# Altium PCB ScreenBase.PcbDoc
Units mil, origin at the board's own origin, x right, y up, seen from the top; angles counter-clockwise.
Board outline 1600 x 2030 mil, 2 copper layers (Top Layer, Bottom Layer); 12 components, 15 nets, 87 pads, 27 vias.
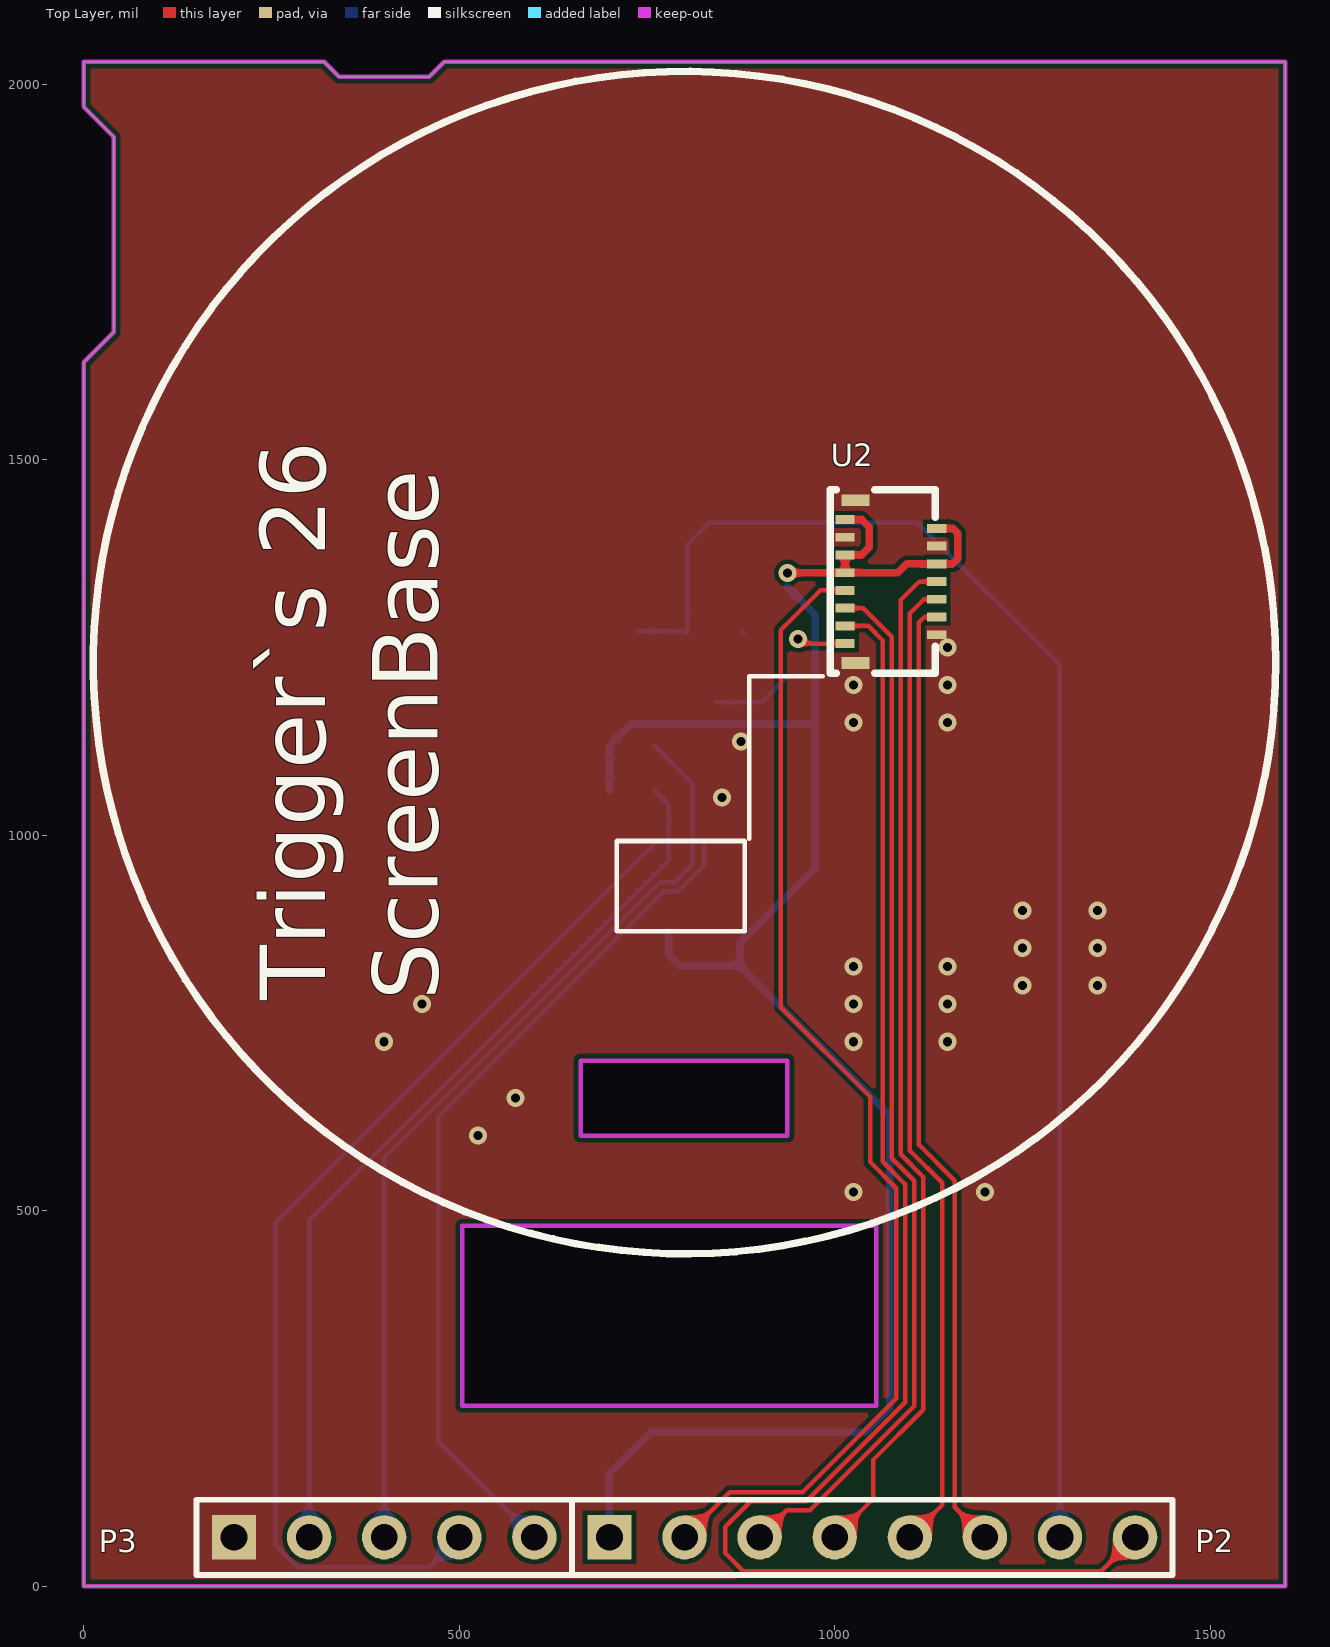
[diagram p0: Top Layer view]
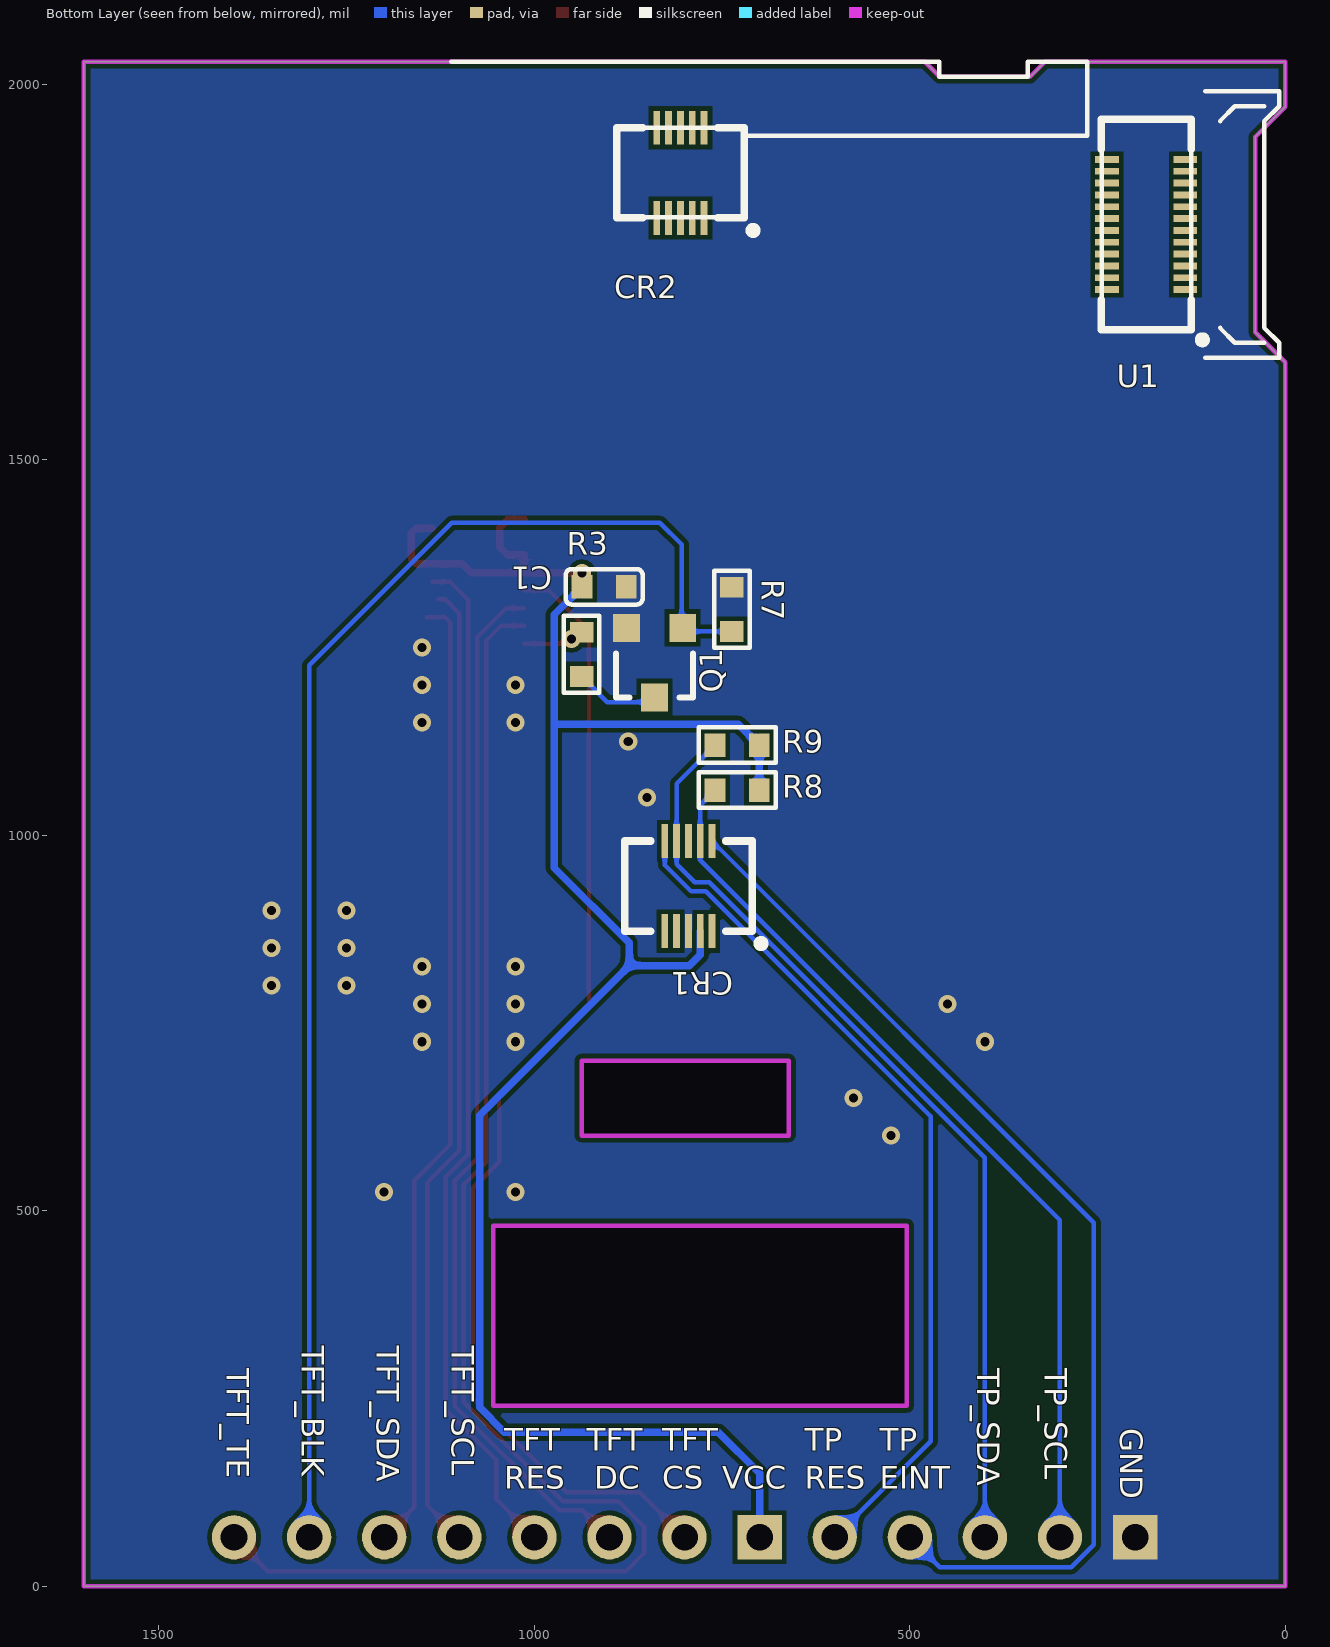
[diagram p1: Bottom Layer view, seen from below]
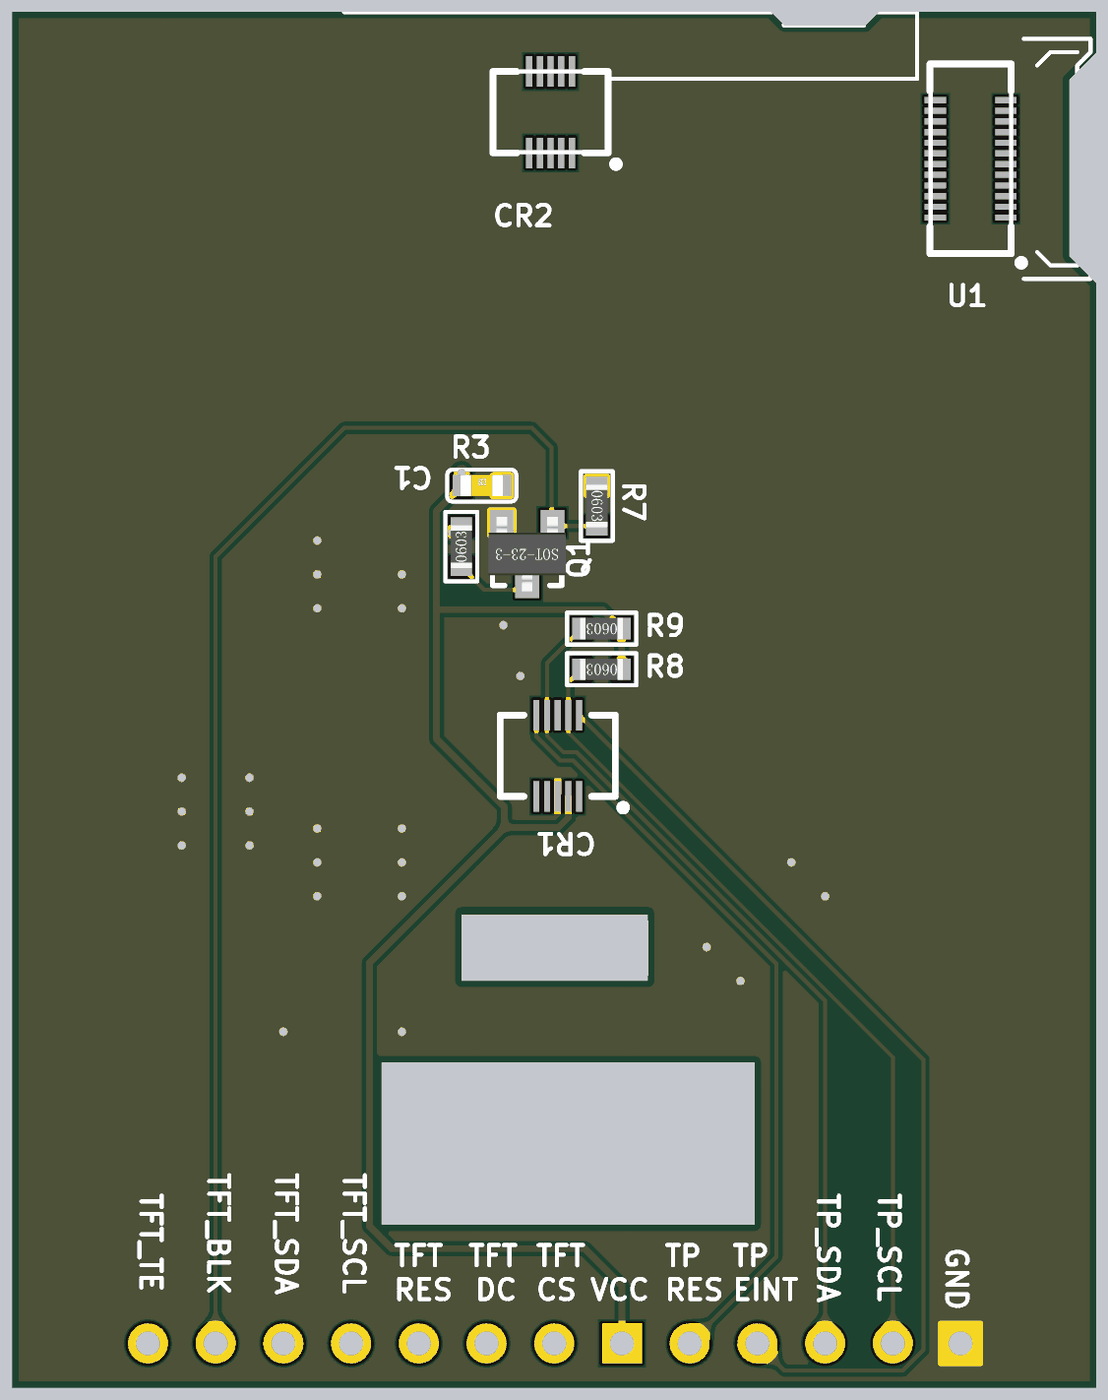
[diagram p2: 3D render of the assembled board from below, using the file's embedded part models]

## Layer stack, top to bottom
Top Solder: solder mask 0.4, Solder Resist, Dk 3.5
Top Layer: signal copper 1.4
Dielectric 1: dielectric 12.6, FR-4, Dk 4.8
Bottom Layer: signal copper 1.4
Bottom Solder: solder mask 0.4, Solder Resist, Dk 3.5

## Board outline
0,0 0,1630 40,1670 40,1930 0,1970 0,2030 320,2030 340,2010 460,2010 480,2030 1600,2030 1600,0
cut-out: 661.42,600 937.01,600 937.01,698 661.42,698
cut-out: 503.94,240 1055.12,240 1055.12,480 503.94,480

## Design rules (kind name [scope] priority, off if disabled: settings)
Clearance [All] p1: gap=6
ComponentClearance [All] p1 off: gap=10 collisioncheckmode=3 verticalgap=10 showdistances=FALSE
Height [All] p1 off: minheight=0 maxheight=1000 prefheight=500
HoleSize [All] p1 off: absolutevalues=TRUE maxlimit=100 minlimit=1 maxpercent=80.000 minpercent=20.000
HoleToHoleClearance [All] p1 off: gap=10 allowstackedmicrovias=TRUE
LayerPairs [All] p1 off: enforce=TRUE
MinimumSolderMaskSliver [All] p1 off: minsoldermaskwidth=10
NetAntennae [All] p1 off: netantennaetolerance=0
PlaneConnect [All] p1: planeconnectstyle=Direct reliefexpansion=20 reliefentries=4 reliefconductorwidth=10 reliefairgap=10
PolygonConnect [All] p1: connectstyle=Direct reliefconductorwidth=10 reliefentries=4 polygonreliefangle="90 Angle" airgapwidth=10
RoutingVias [All] p1: holewidth=12 width=24 viastyle="Through Hole" minholewidth=12 minwidth=24 maxholewidth=12 maxwidth=24
SilkToSilkClearance [All] p1 off: silktosilkclearance=10
SilkToSolderMaskClearance [IsPad] p1 off: minsilkscreentomaskgap=10 clearancetoexposedcopper=TRUE
SolderMaskExpansion [All] p1: expansion=4
Width [All] p1: maxlimit=133 minlimit=6 preferedwidth=6
20 further rules are at their usual default settings.

## Components (designator, comment, footprint, x,y, rotation, side; value= is the part's Value field where it differs from the comment)
C1 "105" 电容_C0603 907.08,1330.94 r180 bottom
CR1 "CR10P" "CONN RCPT 10POS 0.4MM" 784.88,942.36 r180 bottom
CR2 "CR10P" "CONN RCPT 10POS 0.4MM" 795.47,1892.17 r180 bottom
P2 "Header 8" HDR1X8 700,65 r0 top
P3 "Header 5" HDR1X5 200,65 r0 top
Q1 "AO3400" MOS_SOT-23 840,1230 r0 bottom
R3 "10R" 电阻_R0603 937.08,1240.94 r90 bottom
R7 "10K" 电阻_R0603 737.08,1300.94 r270 bottom
R8 "10K" 电阻_R0603 730,1060 r0 bottom
R9 "10K" 电阻_R0603 730,1120 r0 bottom
U1 "TFT" CONN-SMD_DF37NC-24DS-0.4V(51) 185.24,1813.43 r90 bottom
U2 "TFT" FPC-0.30mm-15P 1074.8,1337.87 r270 top

## Footprints (in the part's own frame and the unit in brackets; to place one, negate y for a bottom-side part, rotate by r counter-clockwise, add the part's x,y. Pads: shape width x height; smd on the part's side, far side on the other; paste and mask are expansions set on the pad)
"CONN RCPT 10POS 0.4MM" [mil] "板对板连接器"
  rect 9.05x45 smd: 1(21.49,-70.03) 2(5.74,-70.03) 3(-10,-70.03) 4(-25.75,-70.03) 5(-41.5,-70.03) 6(-41.5,50.04) 7(-25.75,50.04) 8(-10,50.04) 9(5.74,50.04) 10(21.49,50.04)
  silkscreen extent -95,-92 92,50
CONN-SMD_DF37NC-24DS-0.4V(51) [mm] "板对板连接器"
  rect 0.23x0.8 smd: 1(-2.2,-1.325) 2(-1.8,-1.325) 3(-1.4,-1.325) 4(-1,-1.325) 5(-0.6,-1.325) 6(-0.2,-1.325) 7(0.2,-1.325) 8(0.6,-1.325) 9(1,-1.325) 10(1.4,-1.325) 11(1.8,-1.325) 12(2.2,-1.325) 13(2.2,1.325) 14(1.8,1.325) 15(1.4,1.325) 16(1,1.325) 17(0.6,1.325) 18(0.2,1.325) 19(-0.2,1.325) 20(-0.6,1.325) 21(-1,1.325) 22(-1.4,1.325) 23(-1.8,1.325) 24(-2.2,1.325)
  silkscreen extent -4.03,-2.03 3.56,1.52
FPC-0.30mm-15P [mm] "FPC翻盖式 下接"
  rect 0.3x0.65 smd: 1(2.1,-1.55) 2(1.8,1.55) 3(1.5,-1.55) 4(1.2,1.55) 5(0.9,-1.55) 6(0.6,1.55) 7(0.3,-1.55) 8(0,1.55) 9(-0.3,-1.55) 10(-0.6,1.55) 11(-0.9,-1.55) 12(-1.2,1.55) 13(-1.5,-1.55) 14(-1.8,1.55) 15(-2.1,-1.55)
  rect 0.4x0.95 smd: 16(-2.75,-1.2) 17(2.75,-1.2)
  silkscreen extent -3.1,-2.05 3.1,1.5
HDR1X5 [mm] "Connector; Header; 5 Position"
  rect 1.5x1.5 hole 0.9: 1(0,0)
  round 1.5 hole 0.9: 2(2.54,0) 3(5.08,0) 4(7.62,0) 5(10.16,0)
  silkscreen extent -1.27,-1.27 11.43,1.27
HDR1X8 [mm] "Connector; Header; 8 Position"
  rect 1.5x1.5 hole 0.9: 1(0,0)
  round 1.5 hole 0.9: 2(2.54,0) 3(5.08,0) 4(7.62,0) 5(10.16,0) 6(12.7,0) 7(15.24,0) 8(17.78,0)
  silkscreen extent -1.27,-1.27 19.05,1.27
MOS_SOT-23 [mm]
  rect 0.9x0.95 smd: 1(-0.95,-1.175) 2(0,1.175) 3(0.95,-1.175)
  silkscreen extent -1.3,-0.3 1.3,1.18, body extent -1.45,-1.4 1.45,1.4, height 1.2
电容_C0603 [mm]
  rect 0.7x0.8 smd: 1(-0.75,0) 2(0.75,0)
  silkscreen extent -1.3,-0.6 1.3,0.6, body extent -0.8,-0.4 0.8,0.4, height 0.3
电阻_R0603 [mm]
  rect 0.7x0.8 smd: 1(-0.75,0) 2(0.75,0)
  silkscreen extent -1.3,-0.6 1.3,0.6, body extent -0.8,-0.4 0.8,0.4, height 0.45

## Part data
C1: library part cap
CR1 CR2: library part "CONN RCPT 10P", "板对板连接器"
P2: "Header, 8-Pin"
P3: "Header, 5-Pin"
Q1: library part MOSFET-N
R3 R7 R8 R9: library part Res
U1: library part TFT_IPS_8Bit_1.54_240*240
U2: library part TFT_IPS1-1.54寸240*240-AML015410V1, "IPS电容式触摸屏"

## Via types
v1: diameter 24, hole 12, Top Layer to Bottom Layer, tented both sides, 27 vias

## Nets (pads, with @x,y where several pads share a name; then routed paths per layer and width w, separated by ;. In a path a pad name is that pad's centre, name@x,y a point inside that pad or via, vN(x,y) a via of type N, cw(c..) or ccw(c..) an arc to the next point about the centre after c; other vN are vias at no path point)
GND: C1.2 CR1.3 P3.1 Q1.3 R7.1 U2.2 U2.12 U2.13 U2.16 U2.17 | length 1.6
  Bottom Layer w6: Q1.3@877.56,1270.98 Q1.3@878.66,1269.88
  other v1: 1025,525 1200,525 525,600 575,650 400,725 1025,725 1150,725 450,775 1025,775 1150,775 1250,800 1350,800 1025,825 1150,825 1250,850 1350,850 1250,900 1350,900 850,1050 875,1125 1025,1150 1150,1150 1025,1200 1150,1200 1150,1250
NetQ1_2: Q1.2 R3.1 | length 109.9
  Bottom Layer w6: Q1.2@841.26,1177.36 903.03,1177.36 R3.1
SCREEN_VCC: C1.1 CR1.2 P2.1 R8.1 R9.1 U2.9 U2.10 U2.11 U2.14 U2.15 | length 2626.9
  Top Layer w10: v1(936.88,1349.36) 1013.45,1349.36 U2.9 ; U2.15 1035.69,1420.55 1045.88,1410.36 1045.88,1383.36 1035.82,1373.3 U2.11 U2.9 ; U2.14 1157.5,1408.74 1163.88,1402.36 1163.88,1368.36 1157.01,1361.49 U2.10 1096.01,1361.49 1084.2,1349.68 U2.9
  Bottom Layer w10: P2.1 700,150 755,205 1039.92,205 1073,238.08 1073,627 873.64,826.36 ; R8.1 R9.1 728.47,1148 972.88,1148 973.88,1149 ; CR1.2 779.14,841.1 793.88,826.36 873.64,826.36 ; C1.1 973.88,1293.68 973.88,1149 ; 873.64,826.36 873.64,856.64 973.88,956.88 973.88,1149
TFT_BLK: P2.7 Q1.1 R7.2 | length 1933
  Bottom Layer w6: R7.2 802.32,1271.42 803.86,1269.88 803.86,1328.19 803.86,1387.24 832.97,1416.36 1109.88,1416.36 1300,1226.24 P2.7
TFT_CS: P2.2 U2.7 | length 1553.6
  Top Layer w6: P2.2 860,125 957.09,125 1082,249.91 1082,530 1047,565 1047,652 927.88,771.12 927.88,1273.36 980.58,1326.06 U2.7
TFT_DC: P2.3 U2.5 | length 1393.2
  Top Layer w6: P2.3 936,101 967.03,101 1106,239.97 1106,539.94 1075.88,570.06 1075.88,1264.36 1037.8,1302.44 U2.5
TFT_LEDK: R3.2 U2.1 | length 65.5
  Top Layer w6: v1(950.88,1261.36) 957.05,1255.19 U2.1
TFT_RES: P2.4 U2.8 | length 1367.8
  Top Layer w6: P2.4 1051,116 1051,168 1118,235 1118,544.91 1087.88,575.03 1087.88,1313.36 1112.39,1337.87 U2.8
TFT_SCL: P2.5 U2.6 | length 1302
  Top Layer w6: P2.5 1143,108 1143,537 1099.88,580.12 1099.88,1295.36 1118.77,1314.25 U2.6@1128,1314.25
TFT_SDA: P2.6 U2.4 | length 1289.6
  Top Layer w6: U2.4@1143.62,1290.63 U2.4 1119.15,1290.63 1111.88,1283.36 1111.88,588.12 1160,540 1160,105 P2.6
TFT_TE: P2.8 U2.3 | length 2003.4
  Top Layer w6: U2.3 1044.45,1278.82 1063.88,1259.39 1063.88,565.09 1094,534.97 1094,244.94 962.06,113 888,113 854,79 854,44 878,20 1355,20 P2.8
TP_EINT: CR1.10 P3.4 | length 1437
  Bottom Layer w6: P3.4@500,80 P3.4 460,25 285,25 255,55 255,484.02 CR1.10
TP_RES: CR1.6 P3.5 | length 1138.6
  Bottom Layer w6: P3.5 472,193 472,625.48 771.88,925.36 791.36,925.36 826.38,960.38 CR1.6
TP_SCL: CR1.9 P3.2 R8.2 | length 1201.6
  Bottom Layer w6: P3.2 300,487.48 405.05,592.53 779.14,966.62 CR1.9 779.14,1040.39 R8.2
TP_SDA: CR1.7 P3.3 R9.2 | length 1257.7
  Bottom Layer w6: P3.3 400,570.45 766.91,937.36 786.39,937.36 810.63,961.6 CR1.7 810.63,1068.9 R9.2
pads on no net: CR1.1 CR1.4 CR1.5 CR1.8 CR2.1 CR2.2 CR2.3 CR2.4 CR2.5 CR2.6 CR2.7 CR2.8 CR2.9 CR2.10 U1.1 U1.2 U1.3 U1.4 U1.5 U1.6 U1.7 U1.8 U1.9 U1.10 U1.11 U1.12 U1.13 U1.14 U1.15 U1.16 U1.17 U1.18 U1.19 U1.20 U1.21 U1.22 U1.23 U1.24

## Polygon pours and split planes (outlines as drawn)
GND on Top Layer "GND" (solid, remove dead copper, pour order 6): 0,2030 1600,2030 1600,0 0,0
GND on Bottom Layer "GND" (solid, remove dead copper, pour order 4): 0,2025 1600,2025 1600,0 0,0

## Keep-outs
Keep-Out Layer:
  lines w6: 0,0 0,1630 40,1670 40,1930 0,1970 0,2030 320,2030 340,2010 460,2010 480,2030 1600,2030 1600,0 0,0 ; 503.94,240 503.94,480 1055.12,480 1055.12,240 503.94,240 ; 661.42,600 661.42,700 937.01,700 937.01,600 661.42,600

## Silkscreen, mask and mechanical layers (free items; w line width, h text height)
Top Overlay:
  circle w10: c800,1230 r787.4
  lines w6: 885.82,995.35 885.82,1211.89 984.25,1211.89 ; 709.88,872.36 879.88,872.36 879.88,992.36 709.88,992.36 709.88,872.36
  text "Trigger`s 26" at 350,780 h150 r90
  text "ScreenBase" at 500,780 h150 r90
Bottom Overlay:
  lines w6: 27.76,1655.95 67.13,1655.95 86.81,1675.63 ; 27.76,1970.91 67.13,1970.91 86.81,1951.22 ; 106.5,1636.26 8.07,1636.26 8.07,1655.95 27.76,1675.63 27.76,1951.22 8.07,1970.91 8.07,1990.59 106.5,1990.59 ; 125.24,1953.42 125.24,1673.42 245.24,1673.42 244.29,1674.37 244.29,1953.42 126.18,1953.42 ; 716.73,1931.54 263.98,1931.54 263.98,2029.96 342.72,2029.96 342.72,2010.28 421.46,2010.28 460.83,2010.28 460.83,2029.96 716.73,2029.96 1110.43,2029.96 ; 86.81,1675.63 86.81,1675.63 ; 86.81,1951.22 86.81,1951.22 ; 720.47,1823.11 720.47,1941.22 721.42,1942.17 890.47,1942.17 890.47,1822.17 889.53,1823.11 720.47,1823.11
  text "TFT_SCL" at 1110,320 h30 r90
  text "TFT_SDA" at 1210,320 h30 r90
  text "TFT_BLK" at 1310,320 h30 r90
  text "TP_SCL" at 320,290 h30 r90
  text "TP_SDA" at 410,290 h30 r90
  text "TFT_TE" at 1410,290 h30 r90
  text "GND" at 220,210 h30 r90
  text "TP" at 540,180 h30
  text "TP" at 640,180 h30
  text "TFT" at 830,180 h30
  text "TFT" at 930,180 h30
  text "TFT" at 1040,180 h30
  text "EINT" at 540,130 h30
  text "RES" at 640,130 h30
  text "VCC" at 750,130 h30
  text "CS" at 830,130 h30
  text "DC" at 920,130 h30
  text "RES" at 1040,130 h30
Mechanical 1:
  lines w6: 0,0 1600,0 1600,2030 480,2030 460,2010 340,2010 320,2030 0,2030 0,1970 40,1930 40,1670 0,1630 0,0 ; 503.94,240 503.94,480 1055.12,480 1055.12,240 503.94,240 ; 661.42,600 937.01,600 937.01,698 661.42,698 661.42,600